# Altium PCB GRIPPER2009.PcbDoc (part 3 of 4)
Units mm, origin at the board's own origin, x right, y up, seen from the top; angles counter-clockwise.
Board outline 100.25 x 80.25 mm, 4 copper layers (Top Layer, Mid-Layer 1, Mid-Layer 2, Bottom Layer); 370 components, 241 nets, 1110 pads, 418 vias.
Unrouted connection lines stored in the file: 10.
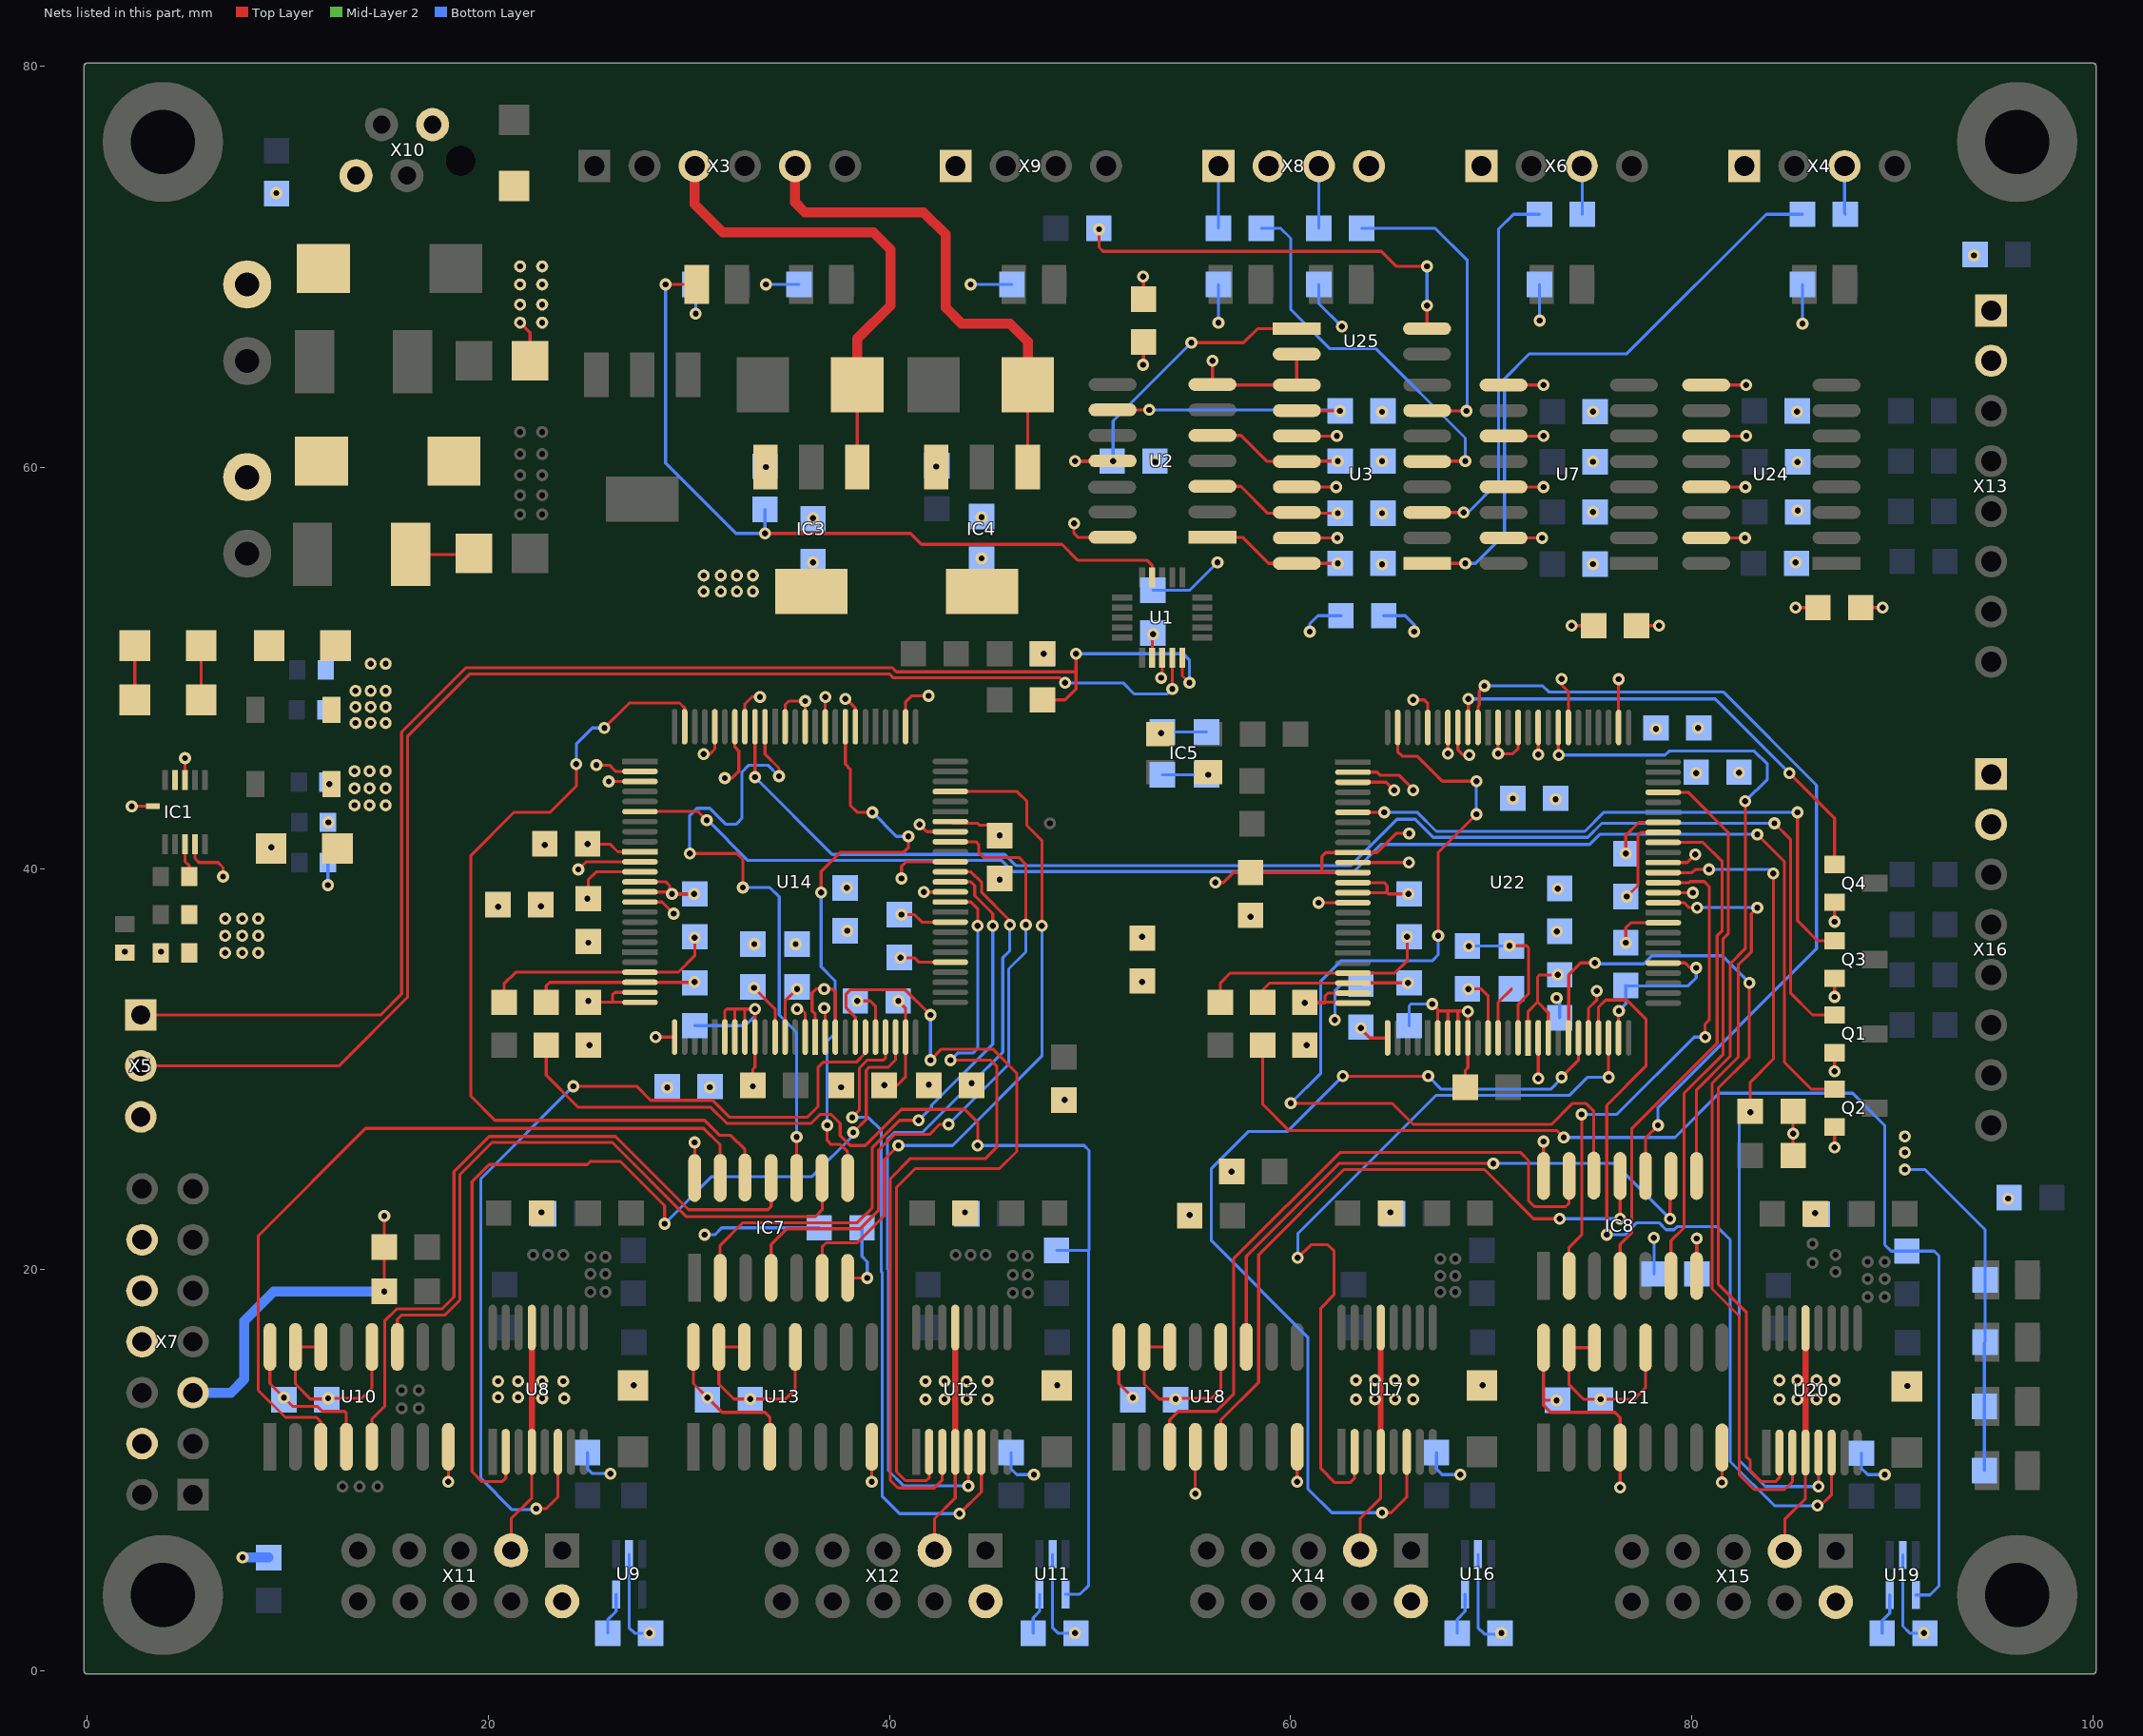
[diagram p5: the nets of this part, all layers, seen from the top]

## Footprints (in the part's own frame and the unit in brackets; to place one, negate y for a bottom-side part, rotate by r counter-clockwise, add the part's x,y. Pads: shape width x height; smd on the part's side, far side on the other; paste and mask are expansions set on the pad)
HEIG/COILS/VLF4012A [mm]
  rect 0.899x1.3 smd: 1(0,0) 2(3.8,0)
  silkscreen extent 0.1,-1.78 3.8,1.75
HEIG/CON/INLINE03 [mil]
  rect 62x62 / inner round 70 / far side rect 62x62 hole 38: 1(0,0)
  round 62 / inner round 70 / far side round 62 hole 38: 2(100,0) 3(200,0)
  silkscreen extent -50,-50 250,50
HEIG/CON/INLINE14/2 [mil]
  rect 62x62 / inner round 70 / far side rect 62x62 hole 38: 1(0,0)
  round 62 / inner round 70 / far side round 62 hole 38: 2(0,100) 3(100,0) 4(100,100) 5(200,0) 6(200,100) 7(300,0) 8(300,100) 9(400,0) 10(400,100) 11(500,0) 12(500,100) 13(600,0) 14(600,100)
  silkscreen extent -75,-75 675,175
HEIG/CON/MICROMATCH/4F [mil]
  round 65 hole 35: 1(1,1) 2(51,101) 3(101,1) 4(151,101)
  round 59 hole 59: HOLE(206.12,30.13)
  silkscreen extent -81,-49 218,151
HEIG/CONN/HE10/10 [mm]
  rect 1.7x1.7 / inner round 1.8 / far side rect 1.7x1.7 hole 0.9: 1(0,0)
  round 1.7 / inner round 1.8 / far side round 1.7 hole 0.9: 2(2.54,0) 3(0,-2.54) 4(2.54,-2.54) 5(0,-5.08) 6(2.54,-5.08) 7(0,-7.62) 8(2.54,-7.62) 9(0,-10.16) 10(2.54,-10.16)
  silkscreen extent -3.19,-15.24 6.06,5.06
HEIG/HOLE/M3 [mil]
  round 236.2 hole 126: 1(0,0)
  silkscreen extent -113,-112 113,113
HEIG/LITTLEFUSE/NANO2 [mil]
  rect 77.13x124 smd: 1(0,0) 2(192.52,0)
  silkscreen extent -49,-73 241,73
HEIG/OSC/SPX0/SG-310 [mm]
  rect 1.4x1.2 smd: 1(0,0) 2(2.4,0) 3(2.4,1.9) 4(0,1.9)
  silkscreen extent -0.4,-0.3 2.8,2.2
"HEIG/PHOENIX/MC 1,5/ 2-G-3,81" [mm]
  round 2.399 hole 1.2: 1(0,0) 2(3.81,0)
  silkscreen extent -2.6,-8 6.5,1.2
HEIG/SM/C_0603#1 [mil]
  rect 32x38 smd: 1(0,0) 2(56,0)
  silkscreen extent -30,-33 86,32
HEIG/SM/C_0603#2 [mil]
  rect 32x38 smd: 1(0,0) 2(-56,0)
  silkscreen extent -86,-32 30,32
HEIG/SM/C_0805#1 [mil]
  rect 50x50 smd: 1(0,0) 2(-84,0)
  silkscreen extent -122,-38 38,38
HEIG/SM/C_0805#2 [mil]
  rect 50x50 smd: 1(0,0) 2(84,0)
  silkscreen extent -38,-38 122,38
HEIG/SM/C_1206 [mil]
  rect 60x60 smd: 1(0,0) 2(130,0)
  silkscreen extent -45,-45 175,45
HEIG/SM/CT_7343 [mil]
  rect 104x96 smd: 1(0,0) 2(260,0)
  silkscreen extent -80,-90 328,90
HEIG/SM/D_0805 [mil]
  rect 48x76 smd: 1(0,0) 2(79,0)
  silkscreen extent -48,-52 118,52
HEIG/SM/DO214 [mil]
  rect 103x108 smd: 1(185,0) 2(0,0)
  silkscreen extent 2,-80 190,80
HEIG/SM/L_1210 [mil]
  rect 72x78 smd: 1(0,0) 2(110,0)
  silkscreen extent -52,-60 162,60
HEIG/SM/QFN20 [mil]
  rect 39.36x12 smd: 1(0,0) 2(0,-19.67) 3(0,-39.33) 4(0,-59) 5(0,-78.67) 11(157.33,-78.67) 12(157.33,-59) 13(157.33,-39.33) 14(157.33,-19.67) 15(157.33,0)
  rect 12x39.36 smd: 6(39.33,-118) 7(59,-118) 8(78.67,-118) 9(98.33,-118) 10(118,-118) 16(118,39.33) 17(98.33,39.33) 18(78.67,39.33) 19(59,39.33) 20(39.33,39.33)
  silkscreen extent -8,-126 165,47
HEIG/SM/R_0603#1 [mil]
  rect 32x38 smd: 1(0,0) 2(56,0)
  silkscreen extent -30,-32 86,32
HEIG/SM/R_0603#2 [mil]
  rect 32x38 smd: 1(0,0) 2(-56,0)
  silkscreen extent -86,-32 30,33
HEIG/SM/R_0805#1 [mil]
  rect 50x50 smd: 1(0,0) 2(-84,0)
  silkscreen extent -122,-38 38,38
HEIG/SM/R_0805#2 [mil]
  rect 50x50 smd: 1(0,0) 2(84,0)
  silkscreen extent -38,-38 122,38
HEIG/SM/R_1206 [mil]
  rect 60x60 smd: 1(0,0) 2(130,0)
  silkscreen extent -45,-45 175,45
HEIG/SM/SC70 [mm]
  rect 0.4x1.4 smd: 1(-1.949,0.2) 2(-2.599,0.2) 3(-3.249,0.2) 4(-3.249,-1.798) 5(-1.949,-1.798)
  silkscreen extent -3.62,-1.42 -1.62,-0.17
HEIG/SM/SOIC04/7.0M [mil]
  rect 25x94 smd: 1(0,0)
  oval 25x94 smd: 2(50,0) 3(50,255.67) 4(0,255.67)
  silkscreen extent -25,60 75,197
HEIG/SM/SOIC14 [mil]
  rect 25x94 smd: 1(0,0)
  oval 25x94 smd: 2(50,0) 3(100,0) 4(150,0) 5(200,0) 6(250,0) 7(300,0) 8(300,196) 9(250,196) 10(200,196) 11(150,196) 12(98.43,196.87) 13(50,196) 14(0,196)
  silkscreen extent -25,60 328,136
HEIG/SM/SOIC16 [mil]
  rect 25x94 smd: 1(0,0)
  oval 25x94 smd: 2(50,0) 3(100,0) 4(150,0) 5(200,0) 6(250,0) 7(300,0) 8(350,0) 9(350,196) 10(300,196) 11(250,196) 12(200,196) 13(150,196) 14(100,196) 15(50,196) 16(0,196)
  silkscreen extent -25,60 375,136
HEIG/SM/SOIC16/7.0M [mil]
  rect 25x94 smd: 1(0,0)
  oval 25x94 smd: 2(50,0) 3(100,0) 4(150,0) 5(200,0) 6(250,0) 7(300,0) 8(350,0) 9(350,255.67) 10(300,255.67) 11(250,255.67) 12(200,255.67) 13(150,255.67) 14(100,255.67) 15(50,255.67) 16(0,255.67)
  silkscreen extent -25,60 375,197
HEIG/SM/SOT223 [mil]
  rect 48x88 smd: 1(0,0) 2(90,0) 3(180,0)
  rect 142x88 smd: 4(90,244)
  silkscreen extent -42,49 222,195
HEIG/SM/TSSOP16 [mil]
  rect 16x90 smd: 1(0,0)
  oval 16x90 smd: 2(25.6,0) 3(51.2,0) 4(76.8,0) 5(102.33,0) 6(127.92,0) 7(153.5,0) 8(179.08,0) 9(179.08,243.87) 10(153.5,243.87) 11(127.92,243.87) 12(102.33,243.87) 13(76.75,243.87) 14(51.17,243.87) 15(25.58,243.87) 16(0,243.87)
  silkscreen extent -20,54 203,192
HEIG/TI/S-PVSON-N10 [mm]
  rect 0.28x1 smd: 1(-1,-1.6) 2(-0.5,-1.6) 3(0,-1.6) 4(0.5,-1.6) 5(1,-1.6) 6(1,1.6) 7(0.5,1.6) 8(0,1.6) 9(-0.5,1.6) 10(-1,1.6)
  rect 0.7x0.28 smd: S(-1.6,0.3)
  Top Layer region: 1.25,0.825 1.251,0.825 1.251,0.451 1.9,0.451 1.9,0.45 1.901,0.45 1.901,0.15 1.9,0.15 1.9,0.149 1.251,0.149 1.251,-0.099 1.9,-0.099 1.9,-0.1 1.901,-0.1 1.901,-0.375 1.9,-0.375 1.9,-0.376 1.251,-0.376 1.251,-0.825 1.25,-0.825 1.25,-0.826 -1.25,-0.826 -1.25,-0.825 -1.251,-0.825 -1.251,-0.401 -1.95,-0.401 -1.95,-0.4 -1.951,-0.4 -1.951,-0.1 -1.95,-0.1 -1.95,-0.099 -1.251,-0.099 -1.251,0.825 -1.25,0.825 -1.25,0.826 1.25,0.826
  Top Layer pour cut-out: -0.811,-0.349 -0.687,-0.35 -0.687,-0.35 -0.687,-0.35 -0.6,-0.438 -0.6,-0.438 -0.6,-0.438 -0.599,-0.438 -0.599,-0.438 -0.599,-0.5 -0.599,-0.5 -0.599,-0.5 -0.599,-0.503 -0.599,-0.503 -0.599,-0.503 -0.599,-0.503 -0.601,-0.565 -0.601,-0.565 -0.601,-0.565 -0.601,-0.565 -0.601,-0.565 -0.69,-0.651 -0.69,-0.651 -0.69,-0.651 -0.69,-0.651 -0.69,-0.651 -0.814,-0.65 -0.814,-0.65 -0.814,-0.65 -0.901,-0.561 -0.901,-0.561 -0.901,-0.561 -0.901,-0.561 -0.901,-0.561 -0.9,-0.437 -0.9,-0.437 -0.9,-0.436 -0.812,-0.349 -0.811,-0.349
  Top Layer pour cut-out: -0.811,0.651 -0.687,0.65 -0.687,0.65 -0.687,0.65 -0.6,0.562 -0.6,0.562 -0.6,0.562 -0.599,0.562 -0.599,0.562 -0.599,0.5 -0.599,0.5 -0.599,0.5 -0.599,0.497 -0.599,0.497 -0.599,0.497 -0.599,0.497 -0.601,0.435 -0.601,0.435 -0.601,0.435 -0.601,0.435 -0.601,0.435 -0.69,0.349 -0.69,0.349 -0.69,0.349 -0.69,0.349 -0.69,0.349 -0.814,0.35 -0.814,0.35 -0.814,0.35 -0.901,0.439 -0.901,0.439 -0.901,0.439 -0.901,0.439 -0.901,0.439 -0.9,0.563 -0.9,0.563 -0.9,0.564 -0.812,0.651 -0.811,0.651
  Top Layer pour cut-out: 0.689,-0.349 0.813,-0.35 0.813,-0.35 0.813,-0.35 0.813,-0.35 0.813,-0.35 0.9,-0.438 0.9,-0.438 0.9,-0.438 0.901,-0.438 0.901,-0.438 0.901,-0.5 0.901,-0.5 0.901,-0.5 0.901,-0.503 0.899,-0.565 0.899,-0.565 0.899,-0.565 0.899,-0.565 0.899,-0.565 0.81,-0.651 0.81,-0.651 0.81,-0.651 0.81,-0.651 0.81,-0.651 0.686,-0.65 0.686,-0.65 0.686,-0.65 0.599,-0.561 0.599,-0.561 0.599,-0.561 0.599,-0.561 0.599,-0.561 0.6,-0.437 0.6,-0.437 0.6,-0.436 0.688,-0.349 0.689,-0.349
  Top Layer pour cut-out: 0.689,0.651 0.813,0.65 0.813,0.65 0.813,0.65 0.813,0.65 0.813,0.65 0.9,0.562 0.9,0.562 0.9,0.562 0.901,0.562 0.901,0.562 0.901,0.5 0.901,0.5 0.901,0.5 0.901,0.497 0.901,0.497 0.901,0.497 0.899,0.435 0.899,0.435 0.899,0.435 0.899,0.435 0.899,0.435 0.81,0.349 0.81,0.349 0.81,0.349 0.81,0.349 0.81,0.349 0.686,0.35 0.686,0.35 0.686,0.35 0.599,0.439 0.599,0.439 0.599,0.439 0.599,0.439 0.599,0.439 0.6,0.563 0.6,0.563 0.6,0.564 0.688,0.651 0.689,0.651
  Top Layer pour cut-out: -0.061,0.151 0.063,0.15 0.063,0.15 0.063,0.15 0.063,0.15 0.063,0.15 0.15,0.062 0.15,0.062 0.15,0.062 0.151,0.062 0.151,0.062 0.151,0 0.151,0 0.151,0 0.151,-0.003 0.149,-0.065 0.149,-0.065 0.149,-0.065 0.149,-0.065 0.149,-0.065 0.06,-0.151 0.06,-0.151 0.06,-0.151 0.06,-0.151 0.06,-0.151 -0.064,-0.15 -0.064,-0.15 -0.064,-0.15 -0.151,-0.061 -0.151,-0.061 -0.151,-0.061 -0.151,-0.061 -0.151,-0.061 -0.15,0.063 -0.15,0.063 -0.15,0.064 -0.062,0.151 -0.061,0.151
  silkscreen extent -1.5,-1.5 1.5,1.5
HEIG/WAGO/733-334 [mm]
  rect 1.6x1.6 / inner rect 1.7x1.7 / far side rect 1.6x1.6 hole 1: 1(0,0)
  round 1.6 / inner round 1.7 / far side round 1.6 hole 1: 2(2.5,0) 3(5,0) 4(7.5,0)
  silkscreen extent -2.5,-3.9 10,5
HEIG/WAGO/733-336 [mm]
  rect 1.6x1.6 / inner rect 1.7x1.7 / far side rect 1.6x1.6 hole 1: 1(0,0)
  round 1.6 / inner round 1.7 / far side round 1.6 hole 1: 2(2.5,0) 3(5,0) 4(7.5,0) 5(10,0) 6(12.5,0)
  silkscreen extent -2.5,-3.9 15,5
HEIG/WAGO/733-338 [mm]
  rect 1.6x1.6 / inner rect 1.7x1.7 / far side rect 1.6x1.6 hole 1: 1(0,0)
  round 1.6 / inner round 1.7 / far side round 1.6 hole 1: 2(2.5,0) 3(5,0) 4(7.5,0) 5(10,0) 6(12.5,0) 7(15,0) 8(17.5,0)
  silkscreen extent -2.5,-3.9 20,5
QUAD.50M/100/WG16.00 [mil]
  rect 11x70 smd: 1(0,0) 10(177.3,0) 20(374.3,0) 60(295.5,608.8) 70(98.5,608.8)
  oval 11x70 smd: 2(19.7,0) 3(39.4,0) 4(59.1,0) 5(78.8,0) 6(98.5,0) 7(118.2,0) 8(137.9,0) 9(157.6,0) 11(197,0) 12(216.7,0) 13(236.4,0) 14(256.1,0) 15(275.8,0) 16(295.5,0) 17(315.2,0) 18(334.9,0) 19(354.6,0) 21(394,0) 22(413.7,0) 23(433.4,0) 24(453.1,0) 25(472.8,0) 51(472.8,608.8) 52(453.1,608.8) 53(433.4,608.8) 54(413.7,608.8) 55(394,608.8) 56(374.3,608.8) 57(354.6,608.8) 58(334.9,608.8) 59(315.2,608.8) 61(275.8,608.8) 62(256.1,608.8) 63(236.4,608.8) 64(216.7,608.8) 65(197,608.8) 66(177.3,608.8) 67(157.6,608.8) 68(137.9,608.8) 69(118.2,608.8) 71(78.8,608.8) 72(59.1,608.8) 73(39.4,608.8) 74(19.7,608.8) 75(0,608.8)
  oval 70x11 smd: 26(540.8,68) 27(540.8,87.7) 28(540.8,107.4) 29(540.8,127.1) 31(540.8,166.5) 32(540.8,186.2) 33(540.8,205.9) 34(540.8,225.6) 35(540.8,245.3) 36(540.8,265) 37(540.8,284.7) 38(540.8,304.4) 39(540.8,324.1) 41(540.8,363.5) 42(540.8,383.2) 43(540.8,402.9) 44(540.8,422.6) 45(540.8,442.3) 46(540.8,462) 47(540.8,481.7) 48(540.8,501.4) 49(540.8,521.1) 50(540.8,540.8) 76(-68,540.8) 77(-68,521.1) 78(-68,501.4) 79(-68,481.7) 81(-68,442.3) 82(-68,422.6) 83(-68,402.9) 84(-68,383.2) 85(-68,363.5) 86(-68,343.8) 87(-68,324.1) 88(-68,304.4) 89(-68,284.7) 91(-68,245.3) 92(-68,225.6) 93(-68,205.9) 94(-68,186.2) 95(-68,166.5) 96(-68,146.8) 97(-68,127.1) 98(-68,107.4) 99(-68,87.7) 100(-68,68)
  rect 70x11 smd: 30(540.8,146.8) 40(540.8,343.8) 80(-68,462) 90(-68,265)
  silkscreen extent -39,-27 511,579
SM/SOT23_123 [mil]
  rect 34x40 smd: 1(0,0) 2(74,0)
  rect 34x50 smd: 3(37,79)
  silkscreen extent -28,40 97,70
VIA1 [mm]
  round 0.6 hole 0.3: FV(0,0)

## Via types
v1: diameter 0.6, hole 0.3, Top Layer to Bottom Layer, 418 vias

## Nets (pads, with @x,y where several pads share a name; then routed paths per layer and width w, separated by ;. In a path a pad name is that pad's centre, name@x,y a point inside that pad or via, vN(x,y) a via of type N, cw(c..) or ccw(c..) an arc to the next point about the centre after c; other vN are vias at no path point)
+1.8V: C10.1 C11.1 C31.1 C32.1 C33.1 C34.1 C38.1 C39.1 C53.1 C55.1 C59.1 C61.1 C63.1 C64.1 L5.2 R6.2 U14.10 U14.12 U14.40 U14.42 U14.59 U14.68 U14.85 U14.93 U22.10 U22.12 U22.40 U22.42 U22.59 U22.68 U22.85 U22.93 ~FV78.FV ~FV79.FV ~FV80.FV ~FV81.FV ~FV82.FV ~FV83.FV ~FV84.FV ~FV85.FV ~FV86.FV | length 59.8
  Top Layer w0.15: v1(24.95,38.5) C39.1@25,38.5 25,39.45 25.382,39.832 U14.12@27.573,39.832 ; U14.10@27.573,40.833 26.467,40.833 26.083,41.217 v1(24.967,41.217) ; v1(33.55,48.55) 33.15,48.55 32.803,48.203 ; U14.40@36.305,31.6 36.305,32.745 36.15,32.9 36.15,33.8 36.35,34 37.15,34 ; v1(36.75,34) 37.15,34 ; U14.42@37.306,31.6 37.306,33.844 37.15,34 ; v1(37.6,29.1) C34.1@37.6,29.2 ; v1(40.6,37.7) 41.25,37.7 41.62,37.33 U14.59@43.036,37.33 ; v1(41.5,42.2) 41.866,41.834 ; v1(45.5,39.45) C33.1@45.5,39.5 ; v1(56.25,39.3) 56.65,39.3 57.15,39.8 C63.1@58,39.8 63.095,39.8 U22.12@63.1,39.795 61.55,39.795 61.55,40.6 61.746,40.796 U22.10@63.1,40.796 64.296,40.796 65.25,41.75 v1(65.9,41.75) ; v1(68.9,45.65) 68.6,45.65 68.33,45.92 ; U22.40@71.832,31.563 71.832,32.882 72.3,33.35 ; v1(72.333,45.683) U22.85@72.333,47.027 ; v1(73.3,34.7) 72.4,34.7 72.3,34.6 72.3,33.35 ; v1(76.7,36.3) 76.7,37.05 76.943,37.293 U22.59@78.563,37.293 ; v1(76.75,38.6) 77.3,39.15 77.3,41.65 77.447,41.797 U22.68@78.563,41.797 ; v1(24.967,41.217) C31.1@24.967,41.233 v1(24.967,41.217) ; 32.803,48.203 U14.93@32.803,47.063 32.803,48.203 ; 41.866,41.834 U14.68@43.036,41.834 41.866,41.834 ; 68.33,45.92 U22.93@68.33,47.027 68.33,45.92 ; 72.3,33.35 72.833,32.817 ; 72.833,32.817 U22.42@72.833,31.563 72.833,32.817 ; v1(12.1,44.2) L5.2@12.2,44.2 v1(12.1,44.2) ; U14.85@36.806,47.063 v1(36.806,48.544) U14.85@36.806,47.063 ; C38.1@52.6,36.534 v1(52.6,36.6) C38.1@52.6,36.534
  Bottom Layer w0.15: R6.2@12,44.3 v1(12.1,44.2) ; v1(12.022,39.172) C10.1@12.022,40.3 ; C32.1@40.5,37.7 v1(40.6,37.7) ; v1(73.3,34.7) C61.1@73.4,34.7 ; C55.1@76.7,38.6 v1(76.75,38.6) ; v1(80.2,44.75) C53.1@80.2,44.8 ; v1(73.2,43.45) C64.1@73.2,43.5 v1(73.2,43.45)
+3.3V: C5.1 C12.1 C13.1 C35.1 C36.1 C37.1 C40.1 C57.1 C58.1 C60.1 C66.1 C67.1 C70.1 C71.1 C72.1 C73.1 C74.1 C75.1 C76.1 C77.1 C78.1 C79.1 IC1.4 IC5.4 IC7.14 IC8.14 L3.2 R2.2 R14.1 R18.1 R22.1 R24.1 R27.1 R46.1 R47.1 R48.1 R49.1 R55.1 R56.1 R69.1 R70.1 R73.1 R74.1 R78.1 R79.1 R80.2 R81.2 R82.2 R83.2 R84.2 R85.2 R86.2 R87.2 U1.3 U9.5 U11.5 U14.3 U14.15 U14.26 U14.46 U14.65 U14.82 U14.96 U16.5 U19.5 U22.3 U22.15 U22.26 U22.46 U22.65 U22.82 U22.96 X7.5 ~FV69.FV ~FV70.FV ~FV71.FV ~FV72.FV ~FV73.FV ~FV74.FV ~FV75.FV ~FV76.FV ~FV77.FV ~FV131.FV ~FV132.FV ~FV133.FV | length 122.7
  Top Layer w0.15: IC1.4@5.4,41.2 5.4,40.5 5.6,40.3 6.55,40.3 6.8,40.05 v1(6.8,39.6) ; R80.2@14.833,18.933 R81.2@14.833,21.133 v1(14.833,22.683) ; C40.1@25,31.2 v1(25.05,31.2) ; v1(29.25,37.75) 28.669,38.331 ; IC7.14@30.3,24.578 v1(30.3,26.35) ; v1(30.75,45.7) 31.05,45.7 31.301,45.952 U14.96@31.301,47.063 ; v1(37.8,48.45) 37.8,48.5 38.307,47.993 U14.82@38.307,47.063 ; v1(38.4,33.4) 39.05,33.4 39.308,33.142 U14.46@39.308,31.6 ; v1(40.6,39.5) 40.6,40.1 40.832,40.332 U14.65@43.036,40.332 ; R83.2@48.7,28.466 v1(48.734,28.466) ; v1(52.65,65.1) 52.667,65.083 C70.1@52.667,66.233 ; IC5.4@53.5,46.7 v1(53.55,46.75) ; v1(53.55,49.5) 53.599,49.549 U1.3@53.599,50.5 ; C66.1@60.7,31.2 v1(60.8,31.2) ; v1(61.394,38.294) U22.15@63.1,38.294 ; U22.3@63.1,44.299 64.751,44.299 v1(65.15,43.9) ; v1(63.5,32.05) 63.5,32 63.95,31.55 64.8,31.55 64.813,31.563 U22.26@64.827,31.563 63.963,31.563 ; v1(66.1,48.4) 66.65,48.4 66.829,48.221 ; v1(73.5,49.45) 73.5,49.15 73.834,48.816 ; U22.46@74.835,31.563 74.835,33.035 75.25,33.45 v1(75.25,33.9) ; v1(80.15,40.7) 79.746,40.296 ; v1(85.034,26.784) R87.2@85.034,25.7 R86.2@85.034,27.9 R86.2@85.034,27.916 ; C74.1@88.4,53 v1(89.5,53) ; 28.669,38.331 U14.15@27.573,38.331 28.669,38.331 ; 66.829,48.221 U22.96@66.829,47.027 66.829,48.221 ; 73.834,48.816 U22.82@73.834,47.027 73.834,48.816 ; 79.746,40.296 U22.65@78.563,40.296 79.746,40.296 ; v1(26.014,44.336) U14.3@27.573,44.336 v1(26.014,44.336) ; v1(28.35,31.6) U14.26@29.3,31.6 v1(28.35,31.6) ; R82.2@41.966,29.2 v1(41.966,29.234) R82.2@41.966,29.2 ; R84.2@54.966,22.7 v1(54.966,22.734) R84.2@54.966,22.7 ; v1(57.05,24.9) R85.2@57.066,24.9 v1(57.05,24.9) ; IC8.14@72.6,24.678 v1(72.6,26.4) IC8.14@72.6,24.678 ; v1(74,52.1) C78.1@75.1,52.1 v1(74,52.1)
  Top Layer w0.5: v1(14.833,18.917) R80.2@14.833,18.933
  Bottom Layer w0.15: C73.1@25.966,1.9 25.966,2.566 26.383,2.983 U9.5@26.383,3.835 ; v1(30.8,21.75) 31.3,21.75 31.65,22.1 ; v1(31.05,29.1) 31.067,29.083 C37.1@31.067,29.133 ; C72.1@47.166,1.9 47.166,2.666 47.483,2.983 U11.5@47.483,3.835 ; C13.1@55.8,46.8 C12.1@53.6,46.8 ; v1(56.35,55.25) 54.967,53.867 ; v1(64.55,62.75) R24.1@64.6,62.8 ; C71.1@64.634,52.6 65.7,52.6 66.15,52.15 v1(66.15,51.8) ; C76.1@68.3,1.9 68.3,2.6 68.683,2.983 U16.5@68.683,3.835 ; v1(73.3,39) C57.1@73.4,39 ; v1(75.067,55.167) R73.1@75.167,55.167 ; v1(75.067,62.767) R74.1@75.167,62.767 ; v1(85.15,55.25) R49.1@85.2,55.2 ; v1(85.234,62.766) R46.1@85.234,62.8 ; R48.1@85.267,57.767 v1(85.267,57.833) ; C77.1@89.466,1.9 89.466,2.516 89.849,2.899 U19.5@89.849,3.802 ; ~FV131.FV@90.6,25 91.6,25 94.6,22 R70.1@94.6,19.5 R78.1@94.6,16.4 94.566,16.366 R55.1@94.566,13.2 R56.1@94.566,10 ; 31.65,22.1 C75.1@36.5,22.1 31.65,22.1 ; C12.1@53.6,46.8 v1(53.55,46.75) 53.55,46.8 C12.1@53.6,46.8 ; 54.967,53.867 C67.1@53.133,53.867 54.967,53.867 ; C36.1@37.8,36.9 v1(37.9,36.9) C36.1@37.8,36.9 ; C35.1@38.3,33.4 v1(38.4,33.4) C35.1@38.3,33.4 ; v1(53.234,60.266) R27.1@53.234,60.3 v1(53.234,60.266) ; v1(63.5,32.05) C58.1@63.5,32.1 v1(63.5,32.05) ; v1(64.55,55.15) R14.1@64.6,55.2 v1(64.55,55.15) ; v1(64.55,57.7) R18.1@64.6,57.7 v1(64.55,57.7) ; v1(64.55,60.3) R22.1@64.6,60.3 v1(64.55,60.3) ; v1(75.067,57.767) R79.1@75.167,57.767 v1(75.067,57.767) ; v1(75.067,60.267) R69.1@75.167,60.267 v1(75.067,60.267) ; C79.1@78.1,19.8 v1(78.1,21.6) C79.1@78.1,19.8 ; v1(80.3,47) C60.1@80.334,47 v1(80.3,47) ; v1(85.25,60.25) R47.1@85.267,60.267 v1(85.25,60.25)
  Bottom Layer w0.5: X7.5@5.3,13.88 7.18,13.88 7.85,14.55 7.85,17.45 9.317,18.917 v1(14.833,18.917)
+5V: C6.1 C7.1 C8.1 C20.1 C22.1 C42.1 C48.1 IC1.3 IC1.9 R1.2 R5.2 U2.14 U10.4 U10.16 U13.4 U13.16 U18.4 U18.16 U21.4 U21.16 X10.1 X11.2 X12.2 X13.1 X13.2 X14.2 X15.2 X16.1 X16.2 ~FV89.FV ~FV90.FV ~FV91.FV ~FV92.FV ~FV93.FV ~FV94.FV ~FV95.FV ~FV96.FV ~FV97.FV | length 47.9
  Top Layer w0.15: C7.1@2.4,48.4 C6.1@2.4,51.1 ; IC1.3@4.9,41.2 4.9,40.35 5.122,40.128 R5.2@5.122,39.6 ; U10.16@9.133,16.162 9.133,14.333 ; v1(9.833,13.633) 9.133,14.333 ; U10.4@12.943,11.183 12.943,12.857 12.85,12.95 11.75,12.95 11.5,13.2 10.266,13.2 9.133,14.333 ; v1(30.933,13.633) 30.233,14.333 ; U13.4@34.043,11.183 34.043,12.657 33.8,12.9 31.666,12.9 30.233,14.333 ; v1(49.2,57.2) 49.2,56.7 49.4,56.5 U2.14@51.122,56.5 ; U18.16@51.433,16.162 51.433,14.333 v1(52.133,13.633) ; v1(55.243,8.857) U18.4@55.243,11.183 ; U21.16@72.6,16.15 U21.16@72.6,16.128 ; v1(73.25,13.5) 72.65,13.5 72.6,13.55 U21.16@72.6,16.128 ; 30.233,14.333 U13.16@30.233,16.162 30.233,14.333 ; U21.16@72.6,16.128 72.6,13.25 72.95,12.9 76.15,12.9 76.41,12.64 U21.4@76.41,11.15 ; U21.4@76.41,11.15 v1(76.41,9.16) U21.4@76.41,11.15
  Bottom Layer w0.15: v1(73.25,13.5) C48.1@73.3,13.5 ; C20.1@9.833,13.533 v1(9.833,13.633) C20.1@9.833,13.533 ; C22.1@30.933,13.533 v1(30.933,13.633) C22.1@30.933,13.533 ; C42.1@52.133,13.533 v1(52.133,13.633) C42.1@52.133,13.533
+12V: C68.1 C69.1 IC3.4 IC4.4 L2.2 X4.1 X6.1 X8.2 X8.4 X9.1 ~FV17.FV ~FV18.FV ~FV19.FV ~FV20.FV ~FV21.FV ~FV22.FV ~FV23.FV ~FV24.FV ~FV26.FV ~FV27.FV ~FV28.FV ~FV29.FV ~FV30.FV ~FV31.FV ~FV32.FV ~FV33.FV | length 2.4
  Top Layer w0.15: ~FV26.FV@21.6,67.2 22.097,66.703 L2.2@22.097,65.303
  Bottom Layer w0.15: v1(36.2,55.25) C69.1@36.25,55.3 ; C69.1@36.25,55.3 C69.1@36.2,55.3 C69.1@36.25,55.3 ; C68.1@44.6,55.4 v1(44.6,55.45) C68.1@44.6,55.4
AGND: C27.2 C28.2 C29.2 C30.2 C39.2 C40.2 C54.2 C56.2 C61.2 C62.2 C65.2 C66.2 C72.2 C73.2 C76.2 C77.2 R38.1 R42.1 R51.1 R60.1 R65.1 R77.1 R150.2 U9.2 U11.2 U14.13 U14.14 U14.24 U14.25 U14.31 U14.32 U14.33 U14.34 U14.39 U16.2 U19.2 U22.13 U22.14 U22.24 U22.25 U22.31 U22.32 U22.33 U22.34 U22.39 ~FV134.FV ~FV135.FV ~FV136.FV | length 100.5
  Top Layer w0.15: v1(22.634,38.116) R150.2@22.634,38.2 ; v1(25,33.4) C40.2@25,33.334 ; U14.25@27.573,33.327 27.566,33.334 C40.2@25,33.334 ; U14.24@27.573,33.828 26.328,33.828 26.2,33.7 26.2,33.35 26.184,33.334 C40.2@25,33.334 ; U14.13@27.573,39.332 28.868,39.332 29.05,39.15 ; v1(29.166,38.734) 29.05,38.85 29.05,39.15 ; v1@30.25,38.75 29.1,38.75 29.05,38.8 v1@29.05,38.831 ; v1(30.266,38.734) 29.148,38.734 v1@29.05,38.831 ; U14.31@31.802,31.6 31.802,32.902 ; U14.32@32.302,31.6 32.302,32.998 32.3,33 31.9,33 31.802,32.902 ; v1(33.2,29.15) R51.1@33.2,29.2 33.2,30 33.303,30.103 U14.34@33.303,31.6 33.303,32.997 31.897,32.997 31.802,32.902 ; v1(33.3,33) 32.8,33 32.803,32.997 ; v1(35.4,33) 35.6,33 35.805,32.795 U14.39@35.805,31.6 ; v1(60.7,33.3) C66.2@60.7,33.334 ; U22.24@63.1,33.791 61.859,33.791 61.7,33.632 61.7,33.334 ; U22.14@63.1,38.795 64.805,38.795 64.85,38.75 65.85,38.75 v1(65.866,38.734) 64.866,38.734 64.8,38.8 64.8,39.15 64.655,39.295 U22.13@63.1,39.295 ; U22.25@63.116,33.274 U22.25@63.1,33.29 63.057,33.334 C66.2@60.7,33.334 ; v1(67.05,33.25) 67.329,32.971 U22.31@67.329,31.563 67.329,32.9 68.33,32.9 ; U22.32@67.829,31.563 67.829,32.899 ; 67.83,32.9 68.33,32.9 ; R77.1@68.7,29.1 68.7,29.95 68.83,30.08 U22.34@68.83,31.563 ; v1(68.83,32.88) U22.34@68.83,31.563 ; v1(70.9,36.15) 71.75,36.15 71.85,36.05 71.85,33.75 71.332,33.232 U22.39@71.332,31.563 ; v1@29.05,38.831 29.05,39.15 ; v1@29.05,38.831 U14.14@27.573,38.831 v1@29.05,38.831 ; 32.803,32.997 U14.33@32.803,31.6 32.803,32.997 ; C66.2@60.7,33.334 60.734,33.3 61.7,33.3 61.7,33.334 ; C66.2@60.7,33.334 61.7,33.334 ; 68.33,32.9 U22.33@68.33,31.563 68.33,32.9 ; 68.33,32.9 68.8,32.9 68.83,32.87 U22.34@68.83,31.563 ; v1(25,36.3) C39.2@25,36.366 v1(25,36.3)
  Mid-Layer 2 w0.15: v1(29.166,38.734) v1(30.266,38.734)
  Bottom Layer w0.15: v1(26.1,9.85) 25.2,9.85 24.966,10.084 ; U9.2@27.032,5.833 27.032,2.167 27.3,1.9 ~FV136.FV@28.05,1.9 C73.2@28.1,1.9 ; C27.2@30.3,32.166 32.816,32.166 33.3,32.65 v1(33.3,33) ; v1(35.334,36.234) C29.2@35.4,36.234 ; v1(47.2,9.8) 46.35,9.8 46.066,10.084 ; U11.2@48.132,5.833 48.132,2.167 48.4,1.9 ~FV135.FV@49.25,1.9 C72.2@49.3,1.9 ; C54.2@65.9,32.166 65.9,33.15 66,33.25 v1(67.05,33.25) ; v1(68.45,9.8) 67.55,9.8 67.266,10.084 ; v1(68.884,36.134) C62.2@68.8,36.134 70.884,36.134 v1(70.9,36.15) C65.2@70.916,36.134 ; U16.2@69.332,5.833 69.332,2.167 69.65,1.85 70.384,1.85 C76.2@70.434,1.9 v1(70.5,1.9) ; v1(73.25,33.55) 73.4,33.4 C61.2@73.4,32.566 ; R65.1@88.433,10.867 88.433,10.117 88.75,9.8 v1(89.6,9.8) ; U19.2@90.499,5.8 90.499,2.251 90.85,1.9 ~FV134.FV@91.55,1.9 C77.2@91.6,1.9 ; 24.966,10.084 R38.1@24.966,10.9 24.966,10.084 ; 46.066,10.084 R42.1@46.066,10.9 46.066,10.084 ; 67.266,10.084 R60.1@67.266,10.9 67.266,10.084 ; C65.2@70.916,36.134 C65.2@71,36.134 C65.2@70.916,36.134 ; v1(30.266,38.734) C28.2@30.3,38.734 v1(30.266,38.734) ; C30.2@33.2,36.234 v1(33.266,36.234) C30.2@33.2,36.234 ; v1(65.866,38.734) C56.2@65.9,38.734 v1(65.866,38.734)
AIN: 
AIN_3977: 
EPWMSYNCI: 
EPWMSYNCO: 
GND: C1.2 C3.2 C5.2 C6.2 C7.2 C8.2 C9.2 C11.2 C12.2 C13.2 C14.2 C16.2 C18.2 C20.2 C21.2 C22.2 C23.2 C31.2 C32.2 C33.2 C34.2 C35.2 C36.2 C37.2 C38.2 C41.2 C42.2 C43.2 C47.2 C48.2 C49.2 C53.2 C55.2 C57.2 C58.2 C59.2 C60.2 C63.2 C64.2 C67.2 C68.2 C69.2 C70.2 C71.2 C74.2 C75.2 C78.2 C79.2 IC1.8 IC1.S IC5.2 IC7.7 IC8.7 Q1.2 Q2.2 Q3.2 Q4.2 R3.2 R7.1 R8.2 R11.1 R13.1 R26.1 R29.1 R30.1 R31.1 R32.1 R33.1 R36.1 R37.1 R41.1 R43.1 R59.1 R61.1 R64.1 R66.1 R100.1 R101.1 R102.1 R103.1 R150.1 U1.2 U2.7 U3.9 U3.11 U3.13 U3.15 U7.9 U7.11 U7.13 U7.15 U8.4 U8.13 U10.8 U10.12 U10.14 U10.15 U12.4 U12.13 U13.8 U13.12 U13.14 U13.15 U14.2 U14.11 U14.41 U14.49 U14.55 U14.62 U14.69 U14.77 U14.87 U14.89 U14.94 U17.4 U17.13 U18.8 U18.12 U18.14 U18.15 U20.4 U20.13 U21.8 U21.12 U21.14 U21.15 U22.2 U22.11 U22.41 U22.49 U22.55 U22.62 U22.69 U22.77 U22.87 U22.89 U22.94 U24.9 U24.11 U24.13 U24.15 U25.2 X1.1 X2.1 X5.3 X7.4 X7.8 X7.10 X7.12 X10.4 X11.3 X12.3 X14.3 X15.3 ~FV5.FV ~FV6.FV ~FV7.FV ~FV8.FV ~FV9.FV ~FV10.FV ~FV11.FV ~FV12.FV ~FV34.FV ~FV45.FV ~FV46.FV ~FV47.FV ~FV48.FV ~FV49.FV ~FV50.FV ~FV51.FV ~FV52.FV ~FV53.FV ~FV54.FV ~FV55.FV ~FV56.FV ~FV57.FV ~FV58.FV ~FV59.FV ~FV60.FV ~FV61.FV ~FV62.FV ~FV63.FV ~FV64.FV ~FV65.FV ~FV66.FV ~FV67.FV ~FV68.FV ~FV87.FV ~FV88.FV ~FV137.FV | length 289.6
  Top Layer w0.15: v1(2.25,43.1) IC1.S@3.3,43.1 ; C8.2@3.7,35.8 v1(3.7,35.85) ; C7.2@5.702,48.4 C6.2@5.702,51.1 ; C11.2@9.198,41 v1(9.198,41.052) ; U10.14@11.673,16.162 U10.15@10.403,16.162 10.403,14.313 11.15,13.567 11.967,13.567 v1(12.034,13.6) 13.7,13.6 14.213,14.113 ; v1(18.023,9.443) U10.8@18.023,11.183 ; v1(20.5,38.1) R150.1@20.5,38.2 ; X11.3@21.153,6.023 21.153,7.603 22.183,8.633 U8.13@22.183,17.127 ; C18.2@22.667,22.833 v1(22.667,22.867) ; v1(24.5,39.95) 24.882,40.332 U14.11@27.573,40.332 ; v1(25.4,45.15) 26.05,45.15 26.364,44.836 ; R36.1@27.233,14.233 27.25,14.25 v1(27.266,14.25) ; v1(31.8,44.5) 32.15,44.5 32.5,44.85 32.5,45.85 32.302,46.048 ; U13.14@32.773,16.162 U13.15@31.503,16.162 31.503,14.313 32.25,13.567 v1(33.067,13.567) 34.817,13.567 35.313,14.063 U13.12@35.313,16.162 ; U14.89@34.804,47.063 34.804,48.154 34.995,48.345 v1(35.805,48.345) ; v1(36.75,33.05) 36.7,33.05 36.744,33.094 v1@36.806,33.094 ; v1(39.123,9.443) U13.8@39.123,11.183 ; v1(39.75,29.2) 39.734,29.184 C34.2@39.734,29.2 40.4,29.2 40.8,29.6 U14.49@40.8,31.45 ; v1(40.45,33.4) 40.8,33.05 40.8,31.609 U14.49@40.809,31.6 ; v1(40.55,35.55) 41.25,35.55 41.471,35.329 U14.55@43.036,35.329 ; U14.77@40.809,47.063 40.809,48.309 41.1,48.6 v1(41.95,48.6) ; X12.3@42.253,6.023 42.253,7.603 43.283,8.633 U12.13@43.283,17.127 ; U14.69@43.036,42.334 43.12,42.25 44.4,42.25 44.5,42.15 45.25,42.15 45.5,41.9 ~FV34.FV@45.5,41.65 C33.2@45.5,41.634 ; R26.1@47.634,50.7 v1(47.684,50.7) ; R43.1@48.333,14.233 48.35,14.25 v1(48.366,14.25) ; v1(52.6,34.35) C38.2@52.6,34.4 ; v1(52.65,69.5) v1@52.667,69.517 ; U1.2@53.1,50.5 53.099,51.633 v1(53.133,51.667) ; U18.14@53.973,16.162 U18.15@52.703,16.162 52.703,14.313 53.45,13.567 v1(54.267,13.567) 54.25,13.55 54.25,13.6 56.05,13.6 56.513,14.063 U18.12@56.513,16.162 ; v1(55.884,44.666) 55.884,44.784 IC5.2@55.9,44.8 ; v1(56.1,65.3) U2.7@56.1,64.12 56.13,64.09 U3.9@60.306,64.09 60.3,64.096 U25.2@60.3,65.63 U25.2@60.32,65.65 ; U3.13@60.306,59.01 v1(62.26,59.01) ; v1(60.323,9.443) U18.8@60.323,11.183 ; U22.11@63.1,40.296 v1(65.896,40.296) ; X14.3@63.453,6.023 63.453,7.603 64.483,8.633 U17.13@64.483,17.127 ; C43.2@64.967,22.833 v1(64.967,22.867) ; v1(66.1,43.9) 66.1,43.95 65.4,44.65 64.448,44.65 64.299,44.799 ; v1(67.829,45.721) U22.94@67.829,47.027 ; R61.1@69.533,14.233 69.55,14.25 v1(69.566,14.25) ; U7.15@70.606,56.47 v1(72.52,56.47) ; U7.13@70.606,59.01 v1(72.59,59.01) ; U7.11@70.606,61.55 v1(72.6,61.55) ; U7.9@70.606,64.09 v1(72.59,64.09) ; U22.87@71.332,47.027 71.332,45.982 71.069,45.719 v1(70.331,45.719) ; v1(72.333,29.533) U22.41@72.333,31.563 ; U21.14@75.14,16.128 U21.15@73.87,16.128 73.87,14.28 74.6,13.55 v1(75.434,13.55) 77.1,13.55 77.68,14.13 U21.12@77.68,16.128 ; U22.49@76.336,31.563 76.336,32.9 v1(76.35,32.9) ; v1(76.7,40.75) 76.7,41.65 77.347,42.297 U22.69@78.563,42.297 ; U22.55@78.563,35.292 79.442,35.292 79.45,35.3 79.65,35.3 79.9,35.05 v1(80.2,35.05) ; IC8.7@80.22,19.7 80.22,21.57 80.23,21.57 ~FV137.FV@80.234,21.566 ; IC8.7@80.25,19.7 IC8.7@80.234,19.716 ; U24.13@80.706,59.01 v1(82.66,59.01) ; v1(81.49,9.41) U21.8@81.49,11.15 ; X15.3@84.62,5.99 84.62,7.57 85.649,8.599 U20.13@85.649,17.094 ; v1(85.15,53) C74.2@86.266,53 ; C49.2@86.134,22.8 v1(86.134,22.834) ; v1(87.1,37.35) Q4.2@87.1,38.32 ; R66.1@90.7,14.2 90.717,14.217 v1(90.733,14.217) ; 14.213,14.113 U10.12@14.213,16.162 14.213,14.113 ; 26.364,44.836 U14.2@27.573,44.836 26.364,44.836 ; 32.302,46.048 U14.94@32.302,47.063 32.302,46.048 ; v1(35.805,48.345) U14.87@35.805,47.063 v1(35.805,48.345) ; v1@36.806,33.094 U14.41@36.806,31.6 v1@36.806,33.094 ; v1@52.667,69.517 C70.2@52.667,68.367 v1@52.667,69.517 ; 64.299,44.799 U22.2@63.1,44.799 64.299,44.799 ; v1(70.331,45.719) U22.89@70.331,47.027 v1(70.331,45.719) ; IC8.7@80.234,19.716 ~FV137.FV@80.234,21.566 ; IC8.7@80.234,19.716 ~FV137.FV@80.234,21.566 ; C9.2@1.9,35.8 v1(1.9,35.85) C9.2@1.9,35.8 ; IC1.8@4.9,44.4 v1(4.9,45.5) IC1.8@4.9,44.4 ; v1(22.833,41.167) C31.2@22.833,41.233 v1(22.833,41.167) ; IC7.7@37.92,19.6 v1(38.9,19.6) IC7.7@37.92,19.6 ; v1(41.719,38.831) U14.62@43.036,38.831 v1(41.719,38.831) ; C23.2@43.767,22.833 v1(43.767,22.867) C23.2@43.767,22.833 ; v1(58,37.6) C63.2@58,37.666 v1(58,37.6) ; U3.15@60.306,56.47 v1(62.32,56.47) U3.15@60.306,56.47 ; U3.11@60.306,61.55 v1(62.3,61.55) U3.11@60.306,61.55 ; U22.77@76.336,47.027 v1(76.336,49.436) U22.77@76.336,47.027 ; C78.2@77.234,52.1 v1(78.35,52.1) C78.2@77.234,52.1 ; U22.62@78.563,38.795 v1(80.045,38.795) U22.62@78.563,38.795 ; U24.15@80.706,56.47 v1(82.63,56.47) U24.15@80.706,56.47 ; U24.11@80.706,61.55 v1(82.7,61.55) U24.11@80.706,61.55 ; U24.9@80.706,64.09 v1(82.69,64.09) U24.9@80.706,64.09 ; v1(87.1,26.1) Q2.2@87.1,27.12 v1(87.1,26.1) ; v1(87.1,29.9) Q1.2@87.1,30.82 v1(87.1,29.9) ; v1(87.1,33.6) Q3.2@87.1,34.52 v1(87.1,33.6)
  Top Layer w0.3: U8.13@22.183,17.127 22.183,10.932 U8.4@22.184,10.933 ; U12.13@43.283,17.127 43.283,10.932 U12.4@43.284,10.933 ; U17.13@64.483,17.127 U17.4@64.484,10.933 U17.4@64.484,10.933 ; U20.13@85.649,17.094 U20.4@85.651,10.9 U20.4@85.651,10.9
  Bottom Layer w0.15: C20.2@12.017,13.483 C20.2@11.967,13.533 ; R7.1@12.022,42.3 v1(12.05,42.3) ; C16.2@22.666,22.867 22.666,22.9 22.766,22.9 C16.2@22.766,22.8 ; v1(28.933,29.083) C37.2@28.933,29.133 ; R11.1@30.3,69.1 30.35,69.05 v1(30.35,67.65) ; C22.2@33.117,13.483 C22.2@33.067,13.533 ; v1(33.85,69.1) R13.1@35.5,69.1 ; C69.2@36.2,57.434 v1(36.2,57.45) ; C36.2@37.8,39.034 v1(37.884,39.034) ; C75.2@38.634,22.1 38.634,20.666 38.9,20.4 v1(38.9,19.6) ; C32.2@40.5,35.566 40.534,35.566 v1(40.55,35.55) ; v1(43.767,22.867) 43.766,22.9 43.866,22.9 C21.2@43.866,22.8 ; C14.2@47.634,50.7 v1(47.684,50.7) ; C12.2@53.6,44.666 C13.2@55.8,44.666 v1(55.884,44.666) ; C42.2@54.317,13.483 C42.2@54.267,13.533 ; v1(60.95,51.8) 60.95,52.2 61.35,52.6 C71.2@62.5,52.6 ; R31.1@61.4,69.1 61.4,68.15 v1(62.55,67) ; v1(62.2,32.45) 62.2,33.9 62.534,34.234 C58.2@63.5,34.234 ; v1(64.967,22.867) 64.966,22.9 65.066,22.9 C41.2@65.066,22.8 ; v1(71.066,43.484) C64.2@71.066,43.5 ; v1(72.4,67.3) R29.1@72.4,69.1 ; v1(73.266,36.866) C57.2@73.4,36.866 ; C48.2@75.484,13.45 C48.2@75.434,13.5 ; v1(76.35,32.9) 76.7,33.25 C59.2@76.7,34.166 ; C55.2@76.7,40.734 v1(76.7,40.75) ; v1(78.2,46.95) C60.2@78.2,47 ; C79.2@80.234,19.8 ~FV137.FV@80.234,21.566 ; v1@80.35,35.05 v1(80.2,35.05) 80.2,34.55 79.8,34.15 C59.2@76.716,34.15 ; v1(82.334,44.784) C53.2@82.334,44.8 ; C47.2@86.133,22.834 86.133,22.867 86.233,22.867 C47.2@86.233,22.767 ; v1(90.733,14.217) R64.1@90.733,14.233 ; v1(94.05,70.55) R102.1@94.1,70.6 ; v1(95.75,23.55) R103.1@95.8,23.6 ; C20.2@11.967,13.533 v1(12.034,13.6) ; C20.2@11.967,13.533 11.967,13.567 v1(12.034,13.6) ; C20.2@11.967,13.533 v1(12.034,13.6) ; C22.2@33.067,13.533 v1(33.067,13.567) C22.2@33.067,13.533 ; C42.2@54.267,13.533 v1(54.267,13.567) C42.2@54.267,13.533 ; C48.2@75.434,13.5 v1(75.434,13.55) C48.2@75.434,13.5 ; C59.2@76.7,34.166 C59.2@76.716,34.15 ; C59.2@76.7,34.166 C59.2@76.716,34.15 ; v1(9.45,73.65) R101.1@9.467,73.633 v1(9.45,73.65) ; v1(27.266,14.25) R37.1@27.266,14.266 v1(27.266,14.25) ; C35.2@40.434,33.4 v1(40.45,33.4) C35.2@40.434,33.4 ; v1(44.05,69.1) R32.1@46.1,69.1 v1(44.05,69.1) ; v1(44.6,57.5) C68.2@44.6,57.534 v1(44.6,57.5) ; v1(48.366,14.25) R41.1@48.366,14.266 v1(48.366,14.25) ; v1(53.133,51.667) C67.2@53.133,51.733 v1(53.133,51.667) ; v1(56.4,67.2) R30.1@56.4,69.1 v1(56.4,67.2) ; v1(69.566,14.25) R59.1@69.566,14.266 v1(69.566,14.25) ; v1(85.5,67.15) R33.1@85.5,69.1 v1(85.5,67.15)
  Bottom Layer w0.5: v1(7.767,5.667) R100.1@9.067,5.667
N11293825: C29.1 U14.37 | length 2.7
  Top Layer w0.15: U14.37@34.804,31.6 34.804,33.404 v1(35.4,34)
  Bottom Layer w0.15: v1(35.4,34) C29.1@35.4,34.1
N11293825_2530: C65.1 U22.37 | length 2.7
  Top Layer w0.15: U22.37@70.331,31.563 70.331,33.331 71,34
N11294255: C62.1 U22.36 | length 3.3
  Top Layer w0.15: v1(68.85,34) 69.5,34 69.831,33.669 U22.36@69.831,31.563
  Bottom Layer w0.15: C62.1@68.8,34 v1(68.85,34)
N11294255_3010: C30.1 U14.36 | length 3
  Top Layer w0.15: v1(33.25,34.05) 34.304,32.996 U14.36@34.304,31.6
  Bottom Layer w0.15: C30.1@33.2,34.1 v1(33.25,34.05)
N12411234: R63.2 R75.1 U19.4 | length 62.9
  Top Layer w0.15: R75.1@58.6,31.2 58.6,28.25 59.9,26.95 73.25,26.95 v1(73.6,26.6)
  Bottom Layer w0.15: v1(73.6,26.6) 79.15,26.6 81.35,28.8 88,28.8 89.6,27.2 89.6,21.25 89.916,20.934 R63.2@90.7,20.934 92.066,20.934 92.3,20.7 92.3,4.25 91.852,3.802 U19.4@91.149,3.802
N12411234_4452: R40.2 R44.1 U11.4 | length 59.2
  Top Layer w0.15: R44.1@22.9,31.2 22.9,29.7 24.5,28.1 31.1,28.1 31.9,27.3 36.1,27.3 36.55,27.75 37.1,27.75 37.55,27.3 37.55,26.7 38.05,26.2 38.8,26.2 40.6,28 43.75,28 44.4,27.35 v1(44.4,26.2)
  Bottom Layer w0.15: v1(44.4,26.2) 49.7,26.2 49.95,25.95 49.95,21 49.9,20.95 49.883,20.967 R40.2@48.333,20.967 49.933,20.967 49.933,4.283 49.485,3.835 U11.4@48.782,3.835
N12412716: C27.1 R44.2 U14.23 | length 8.3
  Top Layer w0.15: R44.2@22.9,33.334 22.9,34.15 23.078,34.328 U14.23@27.573,34.328 30.278,34.328 v1(30.3,34.35)
  Bottom Layer w0.15: C27.1@30.3,34.3 v1(30.3,34.35)
N12412716_2537: C54.1 R75.2 U22.23 | length 8.1
  Top Layer w0.15: R75.2@58.6,33.334 58.6,33.95 58.941,34.291 U22.23@63.1,34.291 63.109,34.3 v1(65.85,34.3)
  Bottom Layer w0.15: v1(65.85,34.3) C54.1@65.9,34.3
N12420570: IC7.11 U10.5 | length 36.3
  Top Layer w0.15: U10.5@14.213,11.183 14.213,12.563 14.85,13.2 14.85,17.45 15.45,18.05 17.7,18.05 18.3,18.65 18.3,24.9 20.05,26.65 26.35,26.65 30,23 33.95,23 34.11,23.16 IC7.11@34.11,24.578
N12420570_2558: IC8.11 U18.5 | length 33.3
  Top Layer w0.15: U18.5@56.513,11.183 56.513,12.513 58.4,14.4 58.4,20.75 62.65,25 69.65,25 72.1,22.55 v1(73.4,22.55) ; v1(76.41,22.55) IC8.11@76.41,24.678
  Bottom Layer w0.15: v1(73.4,22.55) v1(76.41,22.55)
N12420594: IC7.13 U10.3 | length 39.9
  Top Layer w0.15: U10.3@11.673,11.183 11.673,12.427 11.45,12.65 9.9,12.65 8.55,14 8.55,21.7 13.9,27.05 30.75,27.05 31.57,26.23 IC7.13@31.57,24.578
N12420594_2499: IC8.13 U18.3 | length 34.4
  Top Layer w0.15: U18.3@53.973,11.183 53.973,12.523 54.4,12.95 56.3,12.95 57.15,13.8 57.15,20.55 62.45,25.85 71.45,25.85 71.85,25.45 71.85,23.45 72.15,23.15 73.7,23.15 73.87,23.32 IC8.13@73.87,24.678
N12420674: IC8.9 U18.11 | length 30.8
  Top Layer w0.15: U18.11@57.783,16.162 57.783,20.683 62.4,25.3 v1(70.1,25.3) ; v1(78.9,22.55) 78.9,24.628 IC8.9@78.95,24.678
  Bottom Layer w0.15: v1(70.1,25.3) 76.15,25.3 v1(78.9,22.55)
N12420674_4459: IC7.9 U10.11 | length 33.1
  Top Layer w0.15: U10.11@15.483,16.162 15.483,17.533 15.7,17.75 17.85,17.75 18.6,18.5 18.6,24.75 20.2,26.35 26.2,26.35 29.9,22.65 36.3,22.65 36.65,23 IC7.9@36.65,24.578
N13824081: C56.1 R68.2 U22.22 | length 12
  Top Layer w0.15: R68.2@56.5,33.334 56.5,34.3 56.992,34.792 U22.22@63.1,34.792 65.192,34.792 65.8,35.4 v1(65.8,36.6)
  Bottom Layer w0.15: v1(65.8,36.6) C56.1@65.9,36.6
N13824081_4656: C28.1 R45.2 U14.22 | length 11.9
  Top Layer w0.15: R45.2@20.8,33.334 20.8,34.25 21.378,34.828 U14.22@27.573,34.828 29.478,34.828 30.3,35.65 v1(30.3,36.55)
  Bottom Layer w0.15: v1(30.3,36.55) C28.1@30.3,36.6
N13824403: U20.6 U22.47 | length 42.2
  Top Layer w0.15: U22.47@75.335,31.563 75.335,33.085 75.7,33.45 76.75,33.45 77.7,32.5 77.7,30.15 75.75,28.2 v1(75.75,21.75) ; v1(86.25,8.25) 86.4,8.25 86.949,8.799 U20.6@86.949,10.9
  Bottom Layer w0.15: v1(75.75,21.75) 76.65,21.75 77.25,22.35 78.35,22.35 78.7,22 79.1,22 79.25,22.15 81.25,22.15 81.9,21.5 81.9,10.45 84.1,8.25 v1(86.25,8.25)
N13824403_2999: U12.6 U14.47 | length 32.9
  Top Layer w0.15: v1(38.15,27.6) 38.5,27.95 38.5,30.05 38.9,30.45 39.7,30.45 39.808,30.558 U14.47@39.808,31.6 ; v1(43.5,7.85) 44.582,8.932 U12.6@44.582,10.933
  Bottom Layer w0.15: v1(38.15,27.6) 38.95,27.6 39.6,26.95 39.6,19.9 39.65,19.85 39.65,8.7 40.5,7.85 v1(43.5,7.85)
N13825712: U20.2 U22.44 | length 41.9
  Top Layer w0.15: U22.44@73.834,31.563 73.85,31.579 73.85,34.7 74.45,35.3 v1(75.15,35.3) ; v1(82.85,34.3) 82.85,30.6 81.3,29.05 81.3,19.3 82.7,17.9 82.7,10.7 82.9,10.5 82.9,10 83.45,9.45 84.15,9.45 84.35,9.65 U20.2@84.35,10.9
  Bottom Layer w0.15: v1(75.15,35.3) 75.15,35.2 75.2,35.25 77.6,35.25 78,35.65 81.5,35.65 v1(82.85,34.3)
N13825712_4466: U12.2 U14.44 | length 42.4
  Top Layer w0.15: U14.44@38.307,31.6 38.307,32.593 37.85,33.05 37.85,33.75 38.05,33.95 40.8,33.95 v1(42.05,32.7) ; U12.2@41.983,10.933 41.983,9.633 41.85,9.5 40.8,9.5 40.35,9.95 40.35,24.1 41.3,25.05 45.5,25.05 46.35,25.9 46.35,29.8 45.15,31 42.6,31 v1(42.05,30.45)
  Bottom Layer w0.15: v1(42.05,30.45) v1(42.05,32.7)
N13826599: IC7.2 U14.63 | length 30.7
  Top Layer w0.15: IC7.2@31.57,19.6 31.57,21.22 32.7,22.35 38.4,22.35 39.15,23.1 39.15,26.1 40.5,27.45 v1(41.45,27.45) ; U14.63@43.036,39.332 44.068,39.332 44.25,39.15 44.25,38.65 45.15,37.75 v1(45.15,37.15)
  Bottom Layer w0.15: v1(41.45,27.45) 42.1,28.1 42.1,28.2 45.15,31.25 v1(45.15,37.15)
N13826599_2503: IC8.2 U22.63 | length 26.1
  Top Layer w0.15: IC8.2@73.87,19.7 73.87,21.12 74.5,21.75 v1(74.5,27.75) ; U22.63@78.563,39.295 79.845,39.295 79.9,39.35 80.6,39.35 80.85,39.1 80.85,32.45 80.65,32.25 v1(80.65,31.6)
  Bottom Layer w0.15: v1(74.5,27.75) 76.25,27.75 80.1,31.6 v1(80.65,31.6)
N13827602: IC8.4 U22.67 | length 26.1
  Top Layer w0.15: IC8.4@76.41,19.7 76.41,21.26 77,21.85 77,27.05 81.25,31.3 81.25,36.65 81.5,36.9 81.5,40.35 80.55,41.3 78.567,41.3 U22.67@78.563,41.297
N13827602_3002: IC7.4 U14.67 | length 33.8
  Top Layer w0.15: IC7.4@34.11,19.6 34.11,21.26 34.9,22.05 38.55,22.05 39.45,22.95 39.45,25.95 40.25,26.75 42,26.75 42.5,27.25 v1(42.95,27.25) ; U14.67@43.036,41.333 44.317,41.333 44.45,41.2 44.45,40.8 44.7,40.55 46.45,40.55 46.8,40.2 v1(46.8,37.2)
  Bottom Layer w0.15: v1(42.95,27.25) 45.95,30.25 45.95,35 46.8,35.85 v1(46.8,37.2)
N13828620: IC8.6 U22.72 | length 27.3
  Top Layer w0.15: U22.72@78.563,43.799 79.801,43.799 81.8,41.8 81.8,36.75 81.55,36.5 81.55,30.75 79.6,28.8 79.6,22.1 78.95,21.45 IC8.6@78.95,19.7
N13828620_4462: IC7.6 U14.72 | length 35.1
  Top Layer w0.15: IC7.6@36.65,19.6 36.65,21.15 36.85,21.35 38.4,21.35 39.75,22.7 39.75,25.5 v1(40.45,26.2) ; U14.72@43.036,43.835 46.365,43.835 46.85,43.35 46.85,42.15 47.6,41.4 v1(47.6,37.15)
  Bottom Layer w0.15: v1(40.45,26.2) 43.15,26.2 47.6,30.65 v1(47.6,37.15)
N13828962: IC7.8 U14.83 | length 29.4
  Top Layer w0.15: v1(36.6,38.8) 36.6,39.85 37.55,40.8 40.7,40.8 40.95,41.05 v1(40.95,41.6) ; v1(36.9,27.2) 36.9,26.45 37.1,26.25 37.55,26.25 37.92,25.88 IC7.8@37.92,24.578 ; U14.83@37.806,47.063 37.806,45.194 38.05,44.95 38.05,43.15 38.4,42.8 v1(39.15,42.8)
  Bottom Layer w0.15: v1(36.6,38.8) 36.6,35.1 37.3,34.4 37.3,31.8 36.9,31.4 v1(36.9,27.2) ; v1(39.15,42.8) 40.35,41.6 v1(40.95,41.6)
N13828962_2543: IC8.8 U22.83 | length 34.1
  Top Layer w0.15: U22.83@73.334,47.027 73.334,45.666 v1(73.35,45.65) ; IC8.8@80.22,24.678 80.22,28.97 81.9,30.65 81.9,35.25 82.65,36 v1(82.65,43.35)
  Bottom Layer w0.15: v1(73.35,45.65) 78.65,45.65 78.85,45.85 83.1,45.85 83.75,45.2 83.75,44.45 v1(82.65,43.35)
N13829654: IC7.10 U14.91 | length 32.9
  Top Layer w0.15: v1(30.05,40.75) 32.4,40.75 32.7,40.45 v1(32.7,39.05) ; U14.91@33.803,47.063 33.803,45.697 34.5,45 v1(34.5,44.6) ; IC7.10@35.38,24.578 v1(35.38,26.62)
  Bottom Layer w0.15: v1(30.05,40.75) 30.05,42.65 30.4,43 31.05,43 31.85,42.2 32.35,42.2 32.65,42.5 32.65,44.8 33,45.15 33.95,45.15 v1(34.5,44.6) ; v1(32.7,39.05) 34.05,39.05 34.51,38.59 34.51,32.7 35.38,31.83 v1(35.38,26.62)
N13829654_2490: IC8.10 U22.91 | length 43.8
  Top Layer w0.15: U22.91@69.331,47.027 69.331,48.081 69.4,48.15 69.4,48.85 v1(69.65,49.1) ; IC8.10@77.68,24.678 77.68,26.58 v1(78.3,27.2)
  Bottom Layer w0.15: v1(69.65,49.1) 72.55,49.1 72.85,48.8 81.55,48.8 86.2,44.15 86.2,36 78.3,28.1 v1(78.3,27.2)
N13830354: IC7.12 U14.99 | length 44.2
  Top Layer w0.15: v1(24.4,45.2) 24.4,44.1 23.1,42.8 21.3,42.8 19.15,40.65 19.15,28.65 20.35,27.45 30.8,27.45 31.55,26.7 32.1,26.7 32.8,26 IC7.12@32.8,24.6 ; v1(25.8,47) 27.05,48.25 29.55,48.25 29.8,48 U14.99@29.8,47.063
  Bottom Layer w0.15: v1(24.4,45.2) 24.4,46.2 25.2,47 v1(25.8,47)
N13830354_2504: IC8.12 U22.99 | length 47.6
  Top Layer w0.15: v1(60,28.3) 65.05,28.3 66.1,27.25 73,27.25 74.05,28.3 74.7,28.3 75.1,27.9 IC8.12@75.1,24.7 ; U22.99@65.328,47.027 65.328,45.822 65.55,45.6 66.3,45.6 67.55,44.35 v1(69.25,44.35) ; v1(67.35,36.65) 67.35,40.8 v1(69.25,42.7)
  Bottom Layer w0.15: v1(60,28.3) 61.5,29.8 61.5,34.4 62.5,35.4 67.05,35.4 67.35,35.7 v1(67.35,36.65) ; v1(69.25,42.7) v1(69.25,44.35)
N13832239: U17.6 U22.45 | length 48.2
  Top Layer w0.15: v1(62.6,29.65) v1(66.85,29.65) ; v1(64.55,7.9) 65,7.9 65.782,8.682 U17.6@65.782,10.933 ; v1(73.5,29.6) 74.334,30.434 U22.45@74.334,31.563
  Bottom Layer w0.15: v1(62.6,29.65) 59.85,26.9 57.9,26.9 56.05,25.05 56.05,21.45 60.85,16.65 60.85,9.1 62.05,7.9 v1(64.55,7.9) ; v1(66.85,29.65) 67.5,29 72.95,29 73.5,29.55 v1(73.5,29.6)
N13832239_4662: U8.6 U14.45 | length 46.9
  Top Layer w0.15: v1(22.4,8.1) 22.9,8.1 23.482,8.682 U8.6@23.482,10.933 ; v1(24.25,29.15) 27.4,29.15 28.1,28.45 31.2,28.45 32.05,27.6 35.9,27.6 36.45,28.15 36.45,30.1 36.7,30.35 38.35,30.35 38.807,30.807 U14.45@38.807,31.6
  Bottom Layer w0.15: v1(22.4,8.1) 22.35,8.05 21.2,8.05 19.65,9.6 19.65,24.55 v1(24.25,29.15)
N13832960: U17.2 U22.48 | length 38.6
  Top Layer w0.15: v1(60.35,20.6) 61,21.25 61.85,21.25 62.15,20.95 62.15,18.75 61.5,18.1 61.5,10.1 62.2,9.4 62.95,9.4 63.183,9.633 U17.2@63.183,10.933 ; v1(75.835,29.6) U22.48@75.835,31.563
  Bottom Layer w0.15: v1(60.35,20.6) 60.35,21.8 67.25,28.7 73.9,28.7 74.8,29.6 v1(75.835,29.6)
N13832960_4664: U8.2 U14.48 | length 47.1
  Top Layer w0.15: U8.2@20.883,10.933 20.883,9.633 20.7,9.45 19.7,9.45 19.2,9.95 19.2,24.4 20.05,25.25 24.95,25.25 25.1,25.4 26.6,25.4 28.8,23.2 v1(28.8,22.3) ; v1(38.2,26.85) 38.85,27.5 38.85,29.95 39,30.1 39.95,30.1 40.308,30.458 U14.48@40.308,31.6
  Bottom Layer w0.15: v1(28.8,22.3) 31.15,24.65 36.15,24.65 38.2,26.7 v1(38.2,26.85)
N13840259: U12.3 U14.61 | length 45.5
  Top Layer w0.15: 40.533,9.133 42.233,9.133 42.634,9.534 ; U14.61@43.036,38.331 44.069,38.331 44.4,38 v1(44.4,37.15) ; v1(43.05,30.45) 45.05,30.45 45.35,30.15 45.35,26.1 44.8,25.55 41.05,25.55 40.05,24.55 40.05,9.5 40.4,9.15 42.25,9.15 42.634,9.534 ; 42.634,9.534 U12.3@42.634,10.933 42.634,9.534
  Bottom Layer w0.15: v1(43.05,30.45) 43.4,30.8 44.15,30.8 44.4,31.05 v1(44.4,37.15)
N13840259_2491: U20.3 U22.61 | length 39.1
  Top Layer w0.15: U22.61@78.563,38.294 79.606,38.294 79.85,38.05 v1(80.25,38.05) ; v1(83.25,38.05) 82.95,37.75 82.95,35.85 82.3,35.2 82.3,30.6 81,29.3 81,19.05 82.35,17.7 82.35,9.8 83.1,9.05 84.6,9.05 85,9.45 U20.3@85,10.9
  Bottom Layer w0.15: v1(80.25,38.05) v1(83.25,38.05)
N13847925: R86.1 U20.5 U22.64 | length 41.8
  Top Layer w0.15: U22.64@78.563,39.795 79.995,39.795 80.15,39.95 v1(80.85,39.95) ; v1(82.9,27.85) R86.1@82.9,27.9 82.9,29.35 84.05,30.5 v1(84.05,39.75) ; v1(86.299,9.201) U20.5@86.299,10.9
  Bottom Layer w0.15: v1(80.85,39.95) 83.85,39.95 v1(84.05,39.75) ; v1(82.9,27.85) 82.35,27.3 82.35,10.5 83.649,9.201 v1(86.299,9.201)
N13847925_4678: R82.1 U12.5 U14.64 | length 41.1
  Top Layer w0.15: U14.64@43.036,39.832 44.068,39.832 44.6,39.3 44.6,38.8 45.95,37.45 45.95,37.25 v1(46,37.2) ; v1(43.932,9.234) U12.5@43.932,10.933 ; R82.1@44.1,29.2 v1(44.1,29.3)
  Bottom Layer w0.15: v1(43.932,9.234) 40.716,9.234 39.95,10 39.95,20 39.9,20.05 39.9,26.5 40.25,26.85 41.65,26.85 v1(44.1,29.3) 45.65,30.85 45.65,35.55 46,35.9 v1(46,37.2)
N13853734: Q1.1 U14.92 | length 68.2
  Top Layer w0.15: v1(33.3,44.55) 33.303,44.553 U14.92@33.303,47.063 ; v1(84.1,42.25) 84.9,41.45 84.9,33.8 86,32.7 Q1.1@87.1,32.7
  Bottom Layer w0.15: v1(33.3,44.55) 37.15,40.7 45.75,40.7 46.3,40.15 63,40.15 65.3,42.45 66.2,42.45 67.1,41.55 74.8,41.55 75.5,42.25 v1(84.1,42.25)
N13853734_2560: Q4.1 U22.92 | length 24.4
  Top Layer w0.15: U22.92@68.83,47.027 68.85,47.047 v1(68.85,48.45) ; v1(84.85,44.75) 87.1,42.5 Q4.1@87.1,40.2
  Bottom Layer w0.15: v1(68.85,48.45) 81.15,48.45 v1(84.85,44.75)
N13855311: Q2.1 U14.6 | length 72.7
  Top Layer w0.15: U14.6@27.573,42.834 27.588,42.85 30.45,42.85 v1(30.9,42.4) ; v1(83.25,41.7) 84.6,40.35 84.6,30.35 85.95,29 Q2.1@87.1,29
  Bottom Layer w0.15: v1(30.9,42.4) 30.95,42.4 32.95,40.4 45.6,40.4 46.15,39.85 63.15,39.85 64.5,41.2 74.9,41.2 75.4,41.7 v1(83.25,41.7)
N13855311_2498: Q3.1 U22.6 | length 30.6
  Top Layer w0.15: U22.6@63.1,42.798 63.102,42.8 v1(64.65,42.8) ; v1(85.25,42.8) 85.25,37.4 86.25,36.4 Q3.1@87.1,36.4
  Bottom Layer w0.15: v1(64.65,42.8) 66.3,42.8 67.25,41.85 74.65,41.85 75.6,42.8 v1(85.25,42.8)
N15685693: C1.1 F1.2 L1.1 | length 3.2
  Top Layer w0.15: F1.2@16.145,55.645 19.245,55.645 L1.1@19.303,55.703
N15697589: R16.2 U1.5 X5.1 | length 74.3
  Top Layer w0.15: X5.1@2.7,32.7 14.65,32.7 15.7,33.75 15.7,46.8 18.9,50 40.15,50 40.35,49.8 49.3,49.8 49.3,48.95 ; R16.2@47.634,48.4 48.75,48.4 49.3,48.95 ; v1(49.3,50.7) 49.3,48.95 ; U1.5@54.598,50.5 54.6,50.498 54.6,49.6 v1(54.95,49.25)
  Bottom Layer w0.15: v1(49.3,50.7) 54.65,50.7 54.95,50.4 v1(54.95,49.25)
N15697591: U1.4 X5.2 | length 69.2
  Top Layer w0.15: X5.2@2.7,30.16 12.56,30.16 16,33.6 16,46.6 19.1,49.7 40,49.7 40.2,49.5 48.5,49.5 v1(48.75,49.25) ; U1.4@54.099,50.5 54.1,50.499 v1(54.1,48.95)
  Bottom Layer w0.15: v1(48.75,49.25) 51.65,49.25 52.2,48.7 53.85,48.7 v1(54.1,48.95)
N15708299: IC3.3 R10.2 | length 0.1
  Top Layer w0.15: IC3.3@33.828,60 v1(33.85,60)
  Bottom Layer w0.15: R10.2@33.8,60.034 33.834,60 v1(33.85,60)
N15708884: IC4.3 R12.2 | length 0.1
  Top Layer w0.15: IC4.3@42.328,60 v1(42.328,60.028)
  Bottom Layer w0.15: v1(42.328,60.028) R12.2@42.367,60.067
N15712464: D2.2 IC3.1 X3.3 | length 24.1
  Top Layer w0.15: IC3.1@38.4,60 D2.2@38.4,64.1
  Top Layer w0.5: X3.3@30.3,75 30.3,73.1 31.7,71.7 39.2,71.7 40.05,70.85 40.05,68.05 38.4,66.4 D2.2@38.4,64.1
N15713712: D4.2 IC4.1 X3.5 | length 24.7
  Top Layer w0.15: D4.2@46.899,64.1 IC4.1@46.9,60 IC4.1@46.9,60
  Top Layer w0.5: X3.5@35.3,75 35.3,73.2 35.8,72.7 41.7,72.7 42.8,71.6 42.8,67.95 43.6,67.15 46,67.15 46.899,66.251 D4.2@46.899,64.1
N15720446: R15.1 U3.1 | length 30.4
  Top Layer w0.15: U3.1@66.8,55.2 v1(68.7,55.2)
  Bottom Layer w0.15: v1(68.7,55.2) 69.2,55.2 70.65,56.65 70.65,64.4 71.9,65.65 76.75,65.65 83.7,72.6 R15.1@85.5,72.6
N15720486: R14.2 U2.1 U3.16 | length 6.9
  Top Layer w0.15: U2.1@56.1,56.5 57.6,56.5 58.9,55.2 U3.16@60.306,55.2 v1(62.35,55.2)
  Bottom Layer w0.15: v1(62.35,55.2) R14.2@62.466,55.2
N15728555: R15.2 X4.3 | length 2.4
  Bottom Layer w0.15: X4.3@87.6,75 87.6,72.634 R15.2@87.634,72.6
N15731166: R20.2 X6.3 | length 2.4
  Bottom Layer w0.15: X6.3@74.5,75 74.534,74.966 R20.2@74.534,72.6
N15731174: R20.1 U3.3 | length 19.1
  Top Layer w0.15: U3.3@66.8,57.74 v1(68.61,57.74)
  Bottom Layer w0.15: v1(68.61,57.74) 68.84,57.74 70.35,59.25 70.35,71.85 71.1,72.6 R20.1@72.4,72.6
N15731214: R18.2 U2.3 U3.14 | length 7
  Top Layer w0.15: U2.3@56.1,59.04 57.51,59.04 58.85,57.7 U3.14@60.346,57.7 ; v1(62.35,57.7) U3.14@60.346,57.7 ; U3.14@60.346,57.7 U3.14@60.306,57.74 U3.14@60.346,57.7
  Bottom Layer w0.15: v1(62.35,57.7) R18.2@62.466,57.7
N15732451: R25.2 X8.3 | length 3.1
  Bottom Layer w0.15: R25.2@61.4,71.9 X8.3@61.4,75
N15732475: R23.2 X8.1 | length 3.1
  Bottom Layer w0.15: R23.2@56.4,71.9 X8.1@56.4,75
N15733935: R23.1 U3.5 | length 19.6
  Top Layer w0.15: U3.5@66.8,60.28 66.82,60.3 v1(68.7,60.3)
  Bottom Layer w0.15: R23.1@58.534,71.9 59.5,71.9 60,71.4 60,67.85 61.95,65.9 64.25,65.9 68.7,61.45 v1(68.7,60.3)
N15733959: R22.2 U2.5 U3.12 | length 6.9
  Top Layer w0.15: U2.5@56.1,61.58 57.52,61.58 58.82,60.28 U3.12@60.306,60.28 60.326,60.3 v1(62.35,60.3)
  Bottom Layer w0.15: v1(62.35,60.3) R22.2@62.466,60.3
N15735807: R25.1 U3.7 | length 15.4
  Top Layer w0.15: U3.7@66.8,62.82 66.82,62.8 v1(68.75,62.8)
  Bottom Layer w0.15: R25.1@63.534,71.9 67.2,71.9 68.8,70.3 68.8,62.85 v1(68.75,62.8)
N15735831: R24.2 U2.9 U3.10 | length 13.5
  Top Layer w0.15: U2.9@51.122,62.85 v1(52.95,62.85) ; U3.10@60.306,62.82 60.326,62.8 v1(62.45,62.8)
  Bottom Layer w0.15: v1(52.95,62.85) 62.4,62.85 v1(62.45,62.8) ; v1(62.45,62.8) R24.2@62.466,62.8 v1(62.45,62.8)
N15745335: R28.1 U25.4 | length 20.8
  Top Layer w0.15: v1(50.45,71.85) 50.45,70.95 50.65,70.75 64.512,70.75 65.256,70.006 v1(66.794,70.006) ; U25.4@66.794,66.9 v1(66.794,68.044)
  Bottom Layer w0.15: R28.1@50.434,71.9 v1(50.45,71.85) ; v1(66.794,68.044) v1(66.794,70.006)
N15745359: R27.2 U2.11 U25.1 | length 18.7
  Top Layer w0.15: U2.11@51.122,60.31 49.26,60.31 v1(49.25,60.3) v1(51.15,60.3) ; v1(55.05,66.2) 57.65,66.2 58.35,66.9 U25.1@60.3,66.9
  Bottom Layer w0.15: v1(49.25,60.3) R27.2@51.1,60.3 ; v1(51.15,60.3) 51.15,62.3 v1(55.05,66.2)
N15756885: D1.1 R10.1 U1.14 | length 39.8
  Top Layer w0.15: v1(28.85,69.1) D1.1@30.4,69.1 ; v1(33.8,56.7) 41.05,56.7 41.6,56.15 48.6,56.15 49.4,55.35 52.85,55.35 53.099,55.1 U1.14@53.1,54.496
  Bottom Layer w0.15: v1(28.85,69.1) 28.85,60.2 32.35,56.7 v1(33.8,56.7) ; v1(33.8,56.7) R10.1@33.8,57.9 v1(33.8,56.7)